# Altium PCB sitiboard.PcbDoc (part 1 of 2)
Units mm, origin at the board's own origin, x right, y up, seen from the top; angles counter-clockwise.
Board outline 72 x 45 mm, 2 copper layers (Top Layer, Bottom Layer), stack 1.57 mm thick; 60 components, 63 nets, 238 pads, 62 vias.
Unrouted connection lines stored in the file: 20.
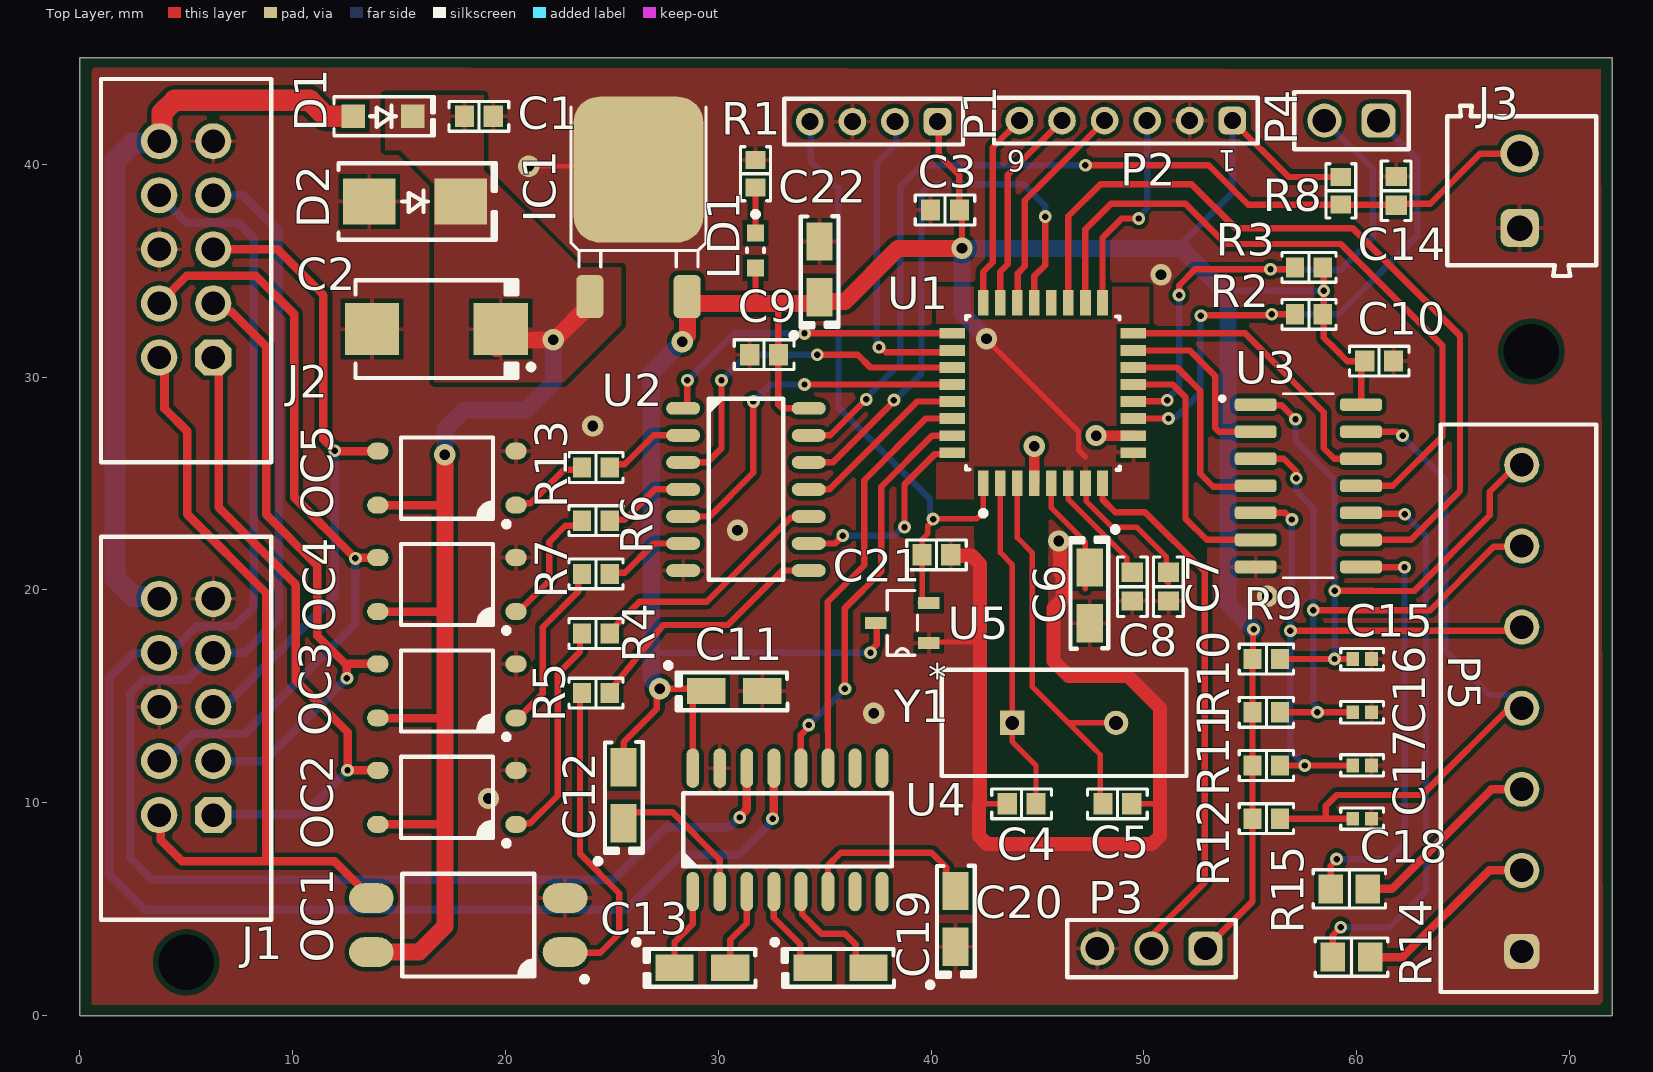
[diagram p0: Top Layer view]
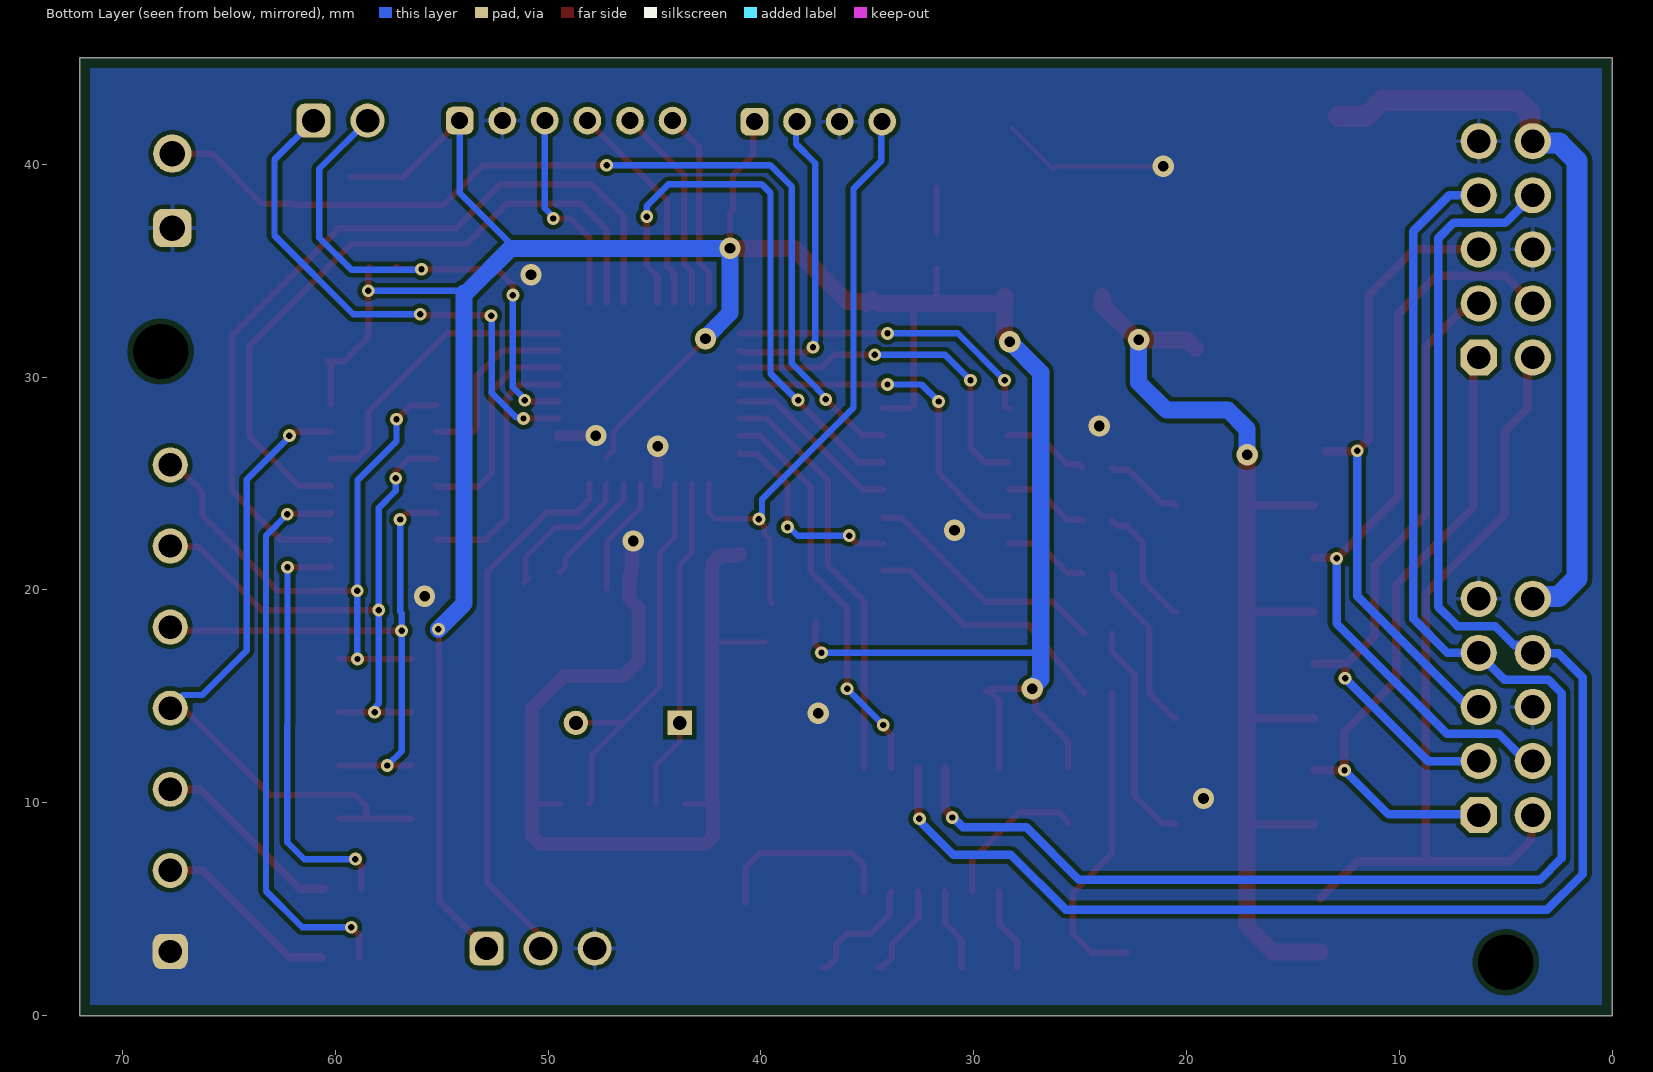
[diagram p1: Bottom Layer view, seen from below]
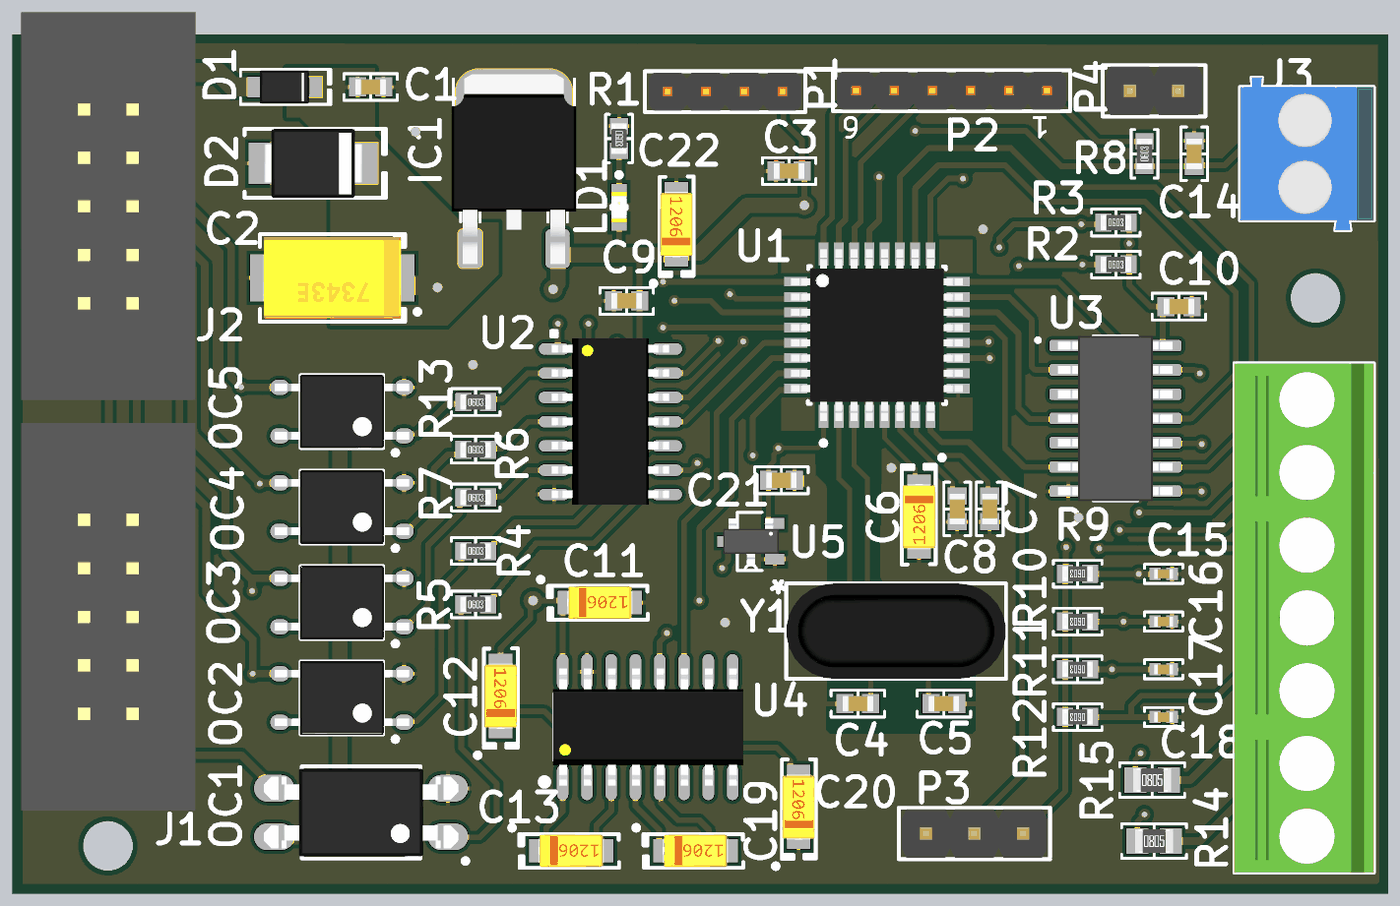
[diagram p2: 3D render of the assembled board from above, using the file's embedded part models]

## Layer stack, top to bottom
Top Solder: solder mask 0.0254, SM-001, Dk 4
Top Layer: signal copper 0.035
Dielectric 1: core 1.5, FR4, Dk 4.6
Bottom Layer: signal copper 0.035
Bottom Solder: solder mask 0.0254, SM-001, Dk 4

## Board outline
0,0 0,45 72,45 72,0

## Design rules (kind name [scope] priority, off if disabled: settings)
AcuteAngle [All] p1: minimum=3.50000000000000E+0001 checktracksonly=FALSE
BoardOutlineClearance "BoardOutlineClearance 1" [All] p1: gap=0.25 ignorepadtopadclearanceinfootprint=FALSE except(0: Arc-SplitContinuation Track-SplitContinuation SMDPad-SplitContinuation THPad-SplitContinuation Via-SplitContinuation Fill-SplitContinuation Poly-SplitContinuation Region-SplitContinuation Text-SplitContinuation) // Milling
BoardOutlineClearance "BoardOutlineClearance 2" [All] p2 off: gap=0.4 ignorepadtopadclearanceinfootprint=FALSE except(0: Arc-SplitContinuation Track-SplitContinuation SMDPad-SplitContinuation THPad-SplitContinuation Via-SplitContinuation Fill-SplitContinuation Poly-SplitContinuation Region-SplitContinuation Text-SplitContinuation) // V-Cut
Clearance "Clearance 3 Oz" [All] p1 off: gap=0.35 ignorepadtopadclearanceinfootprint=FALSE except(0.25: Arc-Hole Track-Hole SMDPad-Hole THPad-Hole Via-Hole Fill-Hole Poly-Hole Region-Hole Text-Hole)
Clearance "Clearance 2 Oz" [All] p2 off: gap=0.3 ignorepadtopadclearanceinfootprint=FALSE except(0.25: Arc-Hole Track-Hole SMDPad-Hole THPad-Hole Via-Hole Fill-Hole Poly-Hole Region-Hole Text-Hole)
Clearance "Clearance-1 1 Oz" [All] p3: gap=0.2 ignorepadtopadclearanceinfootprint=FALSE except(0.25: Arc-Hole Track-Hole SMDPad-Hole THPad-Hole Via-Hole Fill-Hole Poly-Hole Region-Hole Text-Hole) // Standart
Clearance "Clearance-2 1 Oz" [All] p4 off: gap=0.15 ignorepadtopadclearanceinfootprint=FALSE except(0.2: Arc-Fill Arc-Poly Track-Fill Track-Poly SMDPad-Fill SMDPad-Poly THPad-Fill THPad-Poly Via-Fill Via-Poly Fill-Fill Fill-Poly Poly-Poly; 0.25: Arc-Hole Track-Hole SMDPad-Hole THPad-Hole Via-Hole Fill-Hole Poly-Hole Region-Hole Text-Hole) // Advance
Clearance "Clearance-1 1/2 Oz" [All] p5 off: gap=0.125 ignorepadtopadclearanceinfootprint=FALSE except(0.2: Arc-Fill Arc-Poly Track-Fill Track-Poly SMDPad-SMDPad SMDPad-Fill SMDPad-Poly THPad-Fill THPad-Poly Via-Fill Via-Poly Fill-Fill Fill-Poly Poly-Poly Poly-Region Poly-Text; 0.25: Arc-Hole Track-Hole SMDPad-Hole THPad-Hole Via-Hole Fill-Hole Poly-Hole Region-Hole Text-Hole) // Standart
Clearance "Clearance-2 1/2 Oz" [All] p6 off: gap=0.1 ignorepadtopadclearanceinfootprint=FALSE except(0.15: Arc-Fill Arc-Poly Track-Fill Track-Poly SMDPad-SMDPad SMDPad-Fill SMDPad-Poly THPad-Fill THPad-Poly Via-Fill Via-Poly Fill-Fill Fill-Poly Poly-Poly Poly-Region Poly-Text; 0.25: Arc-Hole Track-Hole SMDPad-Hole THPad-Hole Via-Hole Fill-Hole Poly-Hole Region-Hole Text-Hole) // Advance
DiffPairsRouting "DiffPairsRouting 1 Oz" [All] p1: maxlimit=0.254 minlimit=0.2 mostfreqgap=0.254 toplayer_minwidth=0.2 toplayer_maxwidth=0.381 toplayer_prefwidth=0.381 bottomlayer_minwidth=0.2 bottomlayer_maxwidth=0.381 bottomlayer_prefwidth=0.381 maxuncoupledlength=12.7
DiffPairsRouting "DiffPairsRouting 1/2 Oz" [All] p2: maxlimit=0.254 minlimit=0.1 mostfreqgap=0.254 toplayer_minwidth=0.1 toplayer_maxwidth=0.381 toplayer_prefwidth=0.381 bottomlayer_minwidth=0.1 bottomlayer_maxwidth=0.381 bottomlayer_prefwidth=0.381 maxuncoupledlength=12.7
HoleSize "Minimum HoleSize" [IsPad] p1: absolutevalues=TRUE maxlimit=5.9 minlimit=0.6 maxpercent=80.000 minpercent=20.000
HoleSize "Minimum HoleSize VIA 1" [IsVia] p2: absolutevalues=TRUE maxlimit=5.9 minlimit=0.3 maxpercent=80.000 minpercent=20.000 // Standart
HoleSize "Minimum HoleSize VIA 2" [IsVia] p3: absolutevalues=TRUE maxlimit=5.9 minlimit=0.2 maxpercent=80.000 minpercent=20.000 // Advance
HoleToHoleClearance Hole2HoleClearance [All] p1: gap=0.25 allowstackedmicrovias=FALSE
MinimumAnnularRing "Minimum AR VIA Standart" [IsVia] p1: minimumring=0.15
MinimumAnnularRing "Minimum AR PAD Standart" [IsPAD] p2: minimumring=0.2
MinimumAnnularRing "Minimum AR VIA Advance" [IsVia] p3: minimumring=0.1
MinimumAnnularRing "Minimum AR PAD Advance" [IsPAD] p4: minimumring=0.15
MinimumSolderMaskSliver "SolderMask Bridge Standart" [All] p1: minsoldermaskwidth=0.15 // All Masks
MinimumSolderMaskSliver "SolderMask Bridge Advance" [All] p2: minsoldermaskwidth=0.1 // Mask LDI
PlaneClearance "PlaneClearance 3 Oz" [All] p1: clearance=0.35
PlaneClearance "PlaneClearance 2 Oz" [All] p2: clearance=0.3
PlaneClearance "PlaneClearance 1 Oz" [All] p3: clearance=0.2
PlaneClearance "PlaneClearance-1 1/2 Oz" [All] p4: clearance=0.2 // Standart
PlaneClearance "PlaneClearance-2 1/2 Oz" [All] p5: clearance=0.15 // Advance
PlaneConnect "TermalConnect 3 Oz" [All] p1: planeconnectstyle=Relief reliefexpansion=0.2 reliefentries=4 reliefconductorwidth=0.35 reliefairgap=0.35 // Standart
PlaneConnect "TermalConnect 2 Oz" [All] p2: planeconnectstyle=Relief reliefexpansion=0.2 reliefentries=4 reliefconductorwidth=0.3 reliefairgap=0.3 // Standart
PlaneConnect "TermalConnect-1 1 Oz" [All] p3: planeconnectstyle=Relief reliefexpansion=0.2 reliefentries=4 reliefconductorwidth=0.2 reliefairgap=0.2 // Standart
PlaneConnect "TermalConnect-2 1 Oz" [All] p4: pad.planeconnectstyle=Relief pad.reliefexpansion=0.15 pad.reliefentries=4 pad.reliefconductorwidth=0.2 pad.reliefairgap=0.2 via.planeconnectstyle=Direct via.reliefexpansion=0.15 via.reliefentries=4 via.reliefconductorwidth=0.15 via.reliefairgap=0.15 // Advance
PlaneConnect "TermalConnect-1 1/2 Oz" [All] p5: planeconnectstyle=Relief reliefexpansion=0.2 reliefentries=4 reliefconductorwidth=0.2 reliefairgap=0.2 // Standart
PlaneConnect "TermalConnect-2 1/2 Oz" [All] p6: pad.planeconnectstyle=Relief pad.reliefexpansion=0.15 pad.reliefentries=4 pad.reliefconductorwidth=0.15 pad.reliefairgap=0.15 via.planeconnectstyle=Direct via.reliefexpansion=0.15 via.reliefentries=4 via.reliefconductorwidth=0.15 via.reliefairgap=0.15 // Advance
PolygonConnect "PolygonConnect 3 Oz" [All] p1 off: thpad.connectstyle=Relief thpad.reliefconductorwidth=0.35 thpad.reliefentries=4 thpad.polygonreliefangle="90 Angle" thpad.airgapwidth=0.35 smdpad.connectstyle=Relief smdpad.reliefconductorwidth=0.35 smdpad.reliefentries=4 smdpad.polygonreliefangle="90 Angle" smdpad.airgapwidth=0.35 via.connectstyle=Direct via.reliefconductorwidth=0.254 via.reliefentries=4 via.polygonreliefangle="90 Angle" via.airgapwidth=0.254
PolygonConnect "PolygonConnect 2 Oz" [All] p2 off: thpad.connectstyle=Relief thpad.reliefconductorwidth=0.3 thpad.reliefentries=4 thpad.polygonreliefangle="90 Angle" thpad.airgapwidth=0.3 smdpad.connectstyle=Relief smdpad.reliefconductorwidth=0.3 smdpad.reliefentries=4 smdpad.polygonreliefangle="90 Angle" smdpad.airgapwidth=0.3 via.connectstyle=Direct via.reliefconductorwidth=0.254 via.reliefentries=4 via.polygonreliefangle="90 Angle" via.airgapwidth=0.254
PolygonConnect "PolygonConnect-1 1 Oz" [All] p3: thpad.connectstyle=Relief thpad.reliefconductorwidth=0.2 thpad.reliefentries=4 thpad.polygonreliefangle="90 Angle" thpad.airgapwidth=0.2 smdpad.connectstyle=Relief smdpad.reliefconductorwidth=0.2 smdpad.reliefentries=4 smdpad.polygonreliefangle="90 Angle" smdpad.airgapwidth=0.2 via.connectstyle=Direct via.reliefconductorwidth=0.254 via.reliefentries=4 via.polygonreliefangle="90 Angle" via.airgapwidth=0.254 // Standart
PolygonConnect "PolygonConnect-2 1 Oz" [All] p4 off: thpad.connectstyle=Relief thpad.reliefconductorwidth=0.15 thpad.reliefentries=4 thpad.polygonreliefangle="90 Angle" thpad.airgapwidth=0.15 smdpad.connectstyle=Relief smdpad.reliefconductorwidth=0.15 smdpad.reliefentries=4 smdpad.polygonreliefangle="90 Angle" smdpad.airgapwidth=0.15 via.connectstyle=Direct via.reliefconductorwidth=0.254 via.reliefentries=4 via.polygonreliefangle="90 Angle" via.airgapwidth=0.254 // Advance
PolygonConnect "PolygonConnect-1 1/2 Oz" [All] p5 off: thpad.connectstyle=Relief thpad.reliefconductorwidth=0.15 thpad.reliefentries=4 thpad.polygonreliefangle="90 Angle" thpad.airgapwidth=0.2 smdpad.connectstyle=Relief smdpad.reliefconductorwidth=0.2 smdpad.reliefentries=4 smdpad.polygonreliefangle="90 Angle" smdpad.airgapwidth=0.2 via.connectstyle=Direct via.reliefconductorwidth=0.254 via.reliefentries=4 via.polygonreliefangle="90 Angle" via.airgapwidth=0.254 // Standart
PolygonConnect "PolygonConnect-2 1/2 Oz" [All] p6 off: thpad.connectstyle=Relief thpad.reliefconductorwidth=0.125 thpad.reliefentries=4 thpad.polygonreliefangle="90 Angle" thpad.airgapwidth=0.15 smdpad.connectstyle=Relief smdpad.reliefconductorwidth=0.125 smdpad.reliefentries=4 smdpad.polygonreliefangle="90 Angle" smdpad.airgapwidth=0.15 via.connectstyle=Direct via.reliefconductorwidth=0.254 via.reliefentries=4 via.polygonreliefangle="90 Angle" via.airgapwidth=0.254 // Advance
RoutingCorners [All] p1 off: cornerstyle=45-Degree minsetback=2.54 maxsetback=2.54
RoutingVias [All] p1: holewidth=0.3 width=0.6 viastyle="Through Hole" minholewidth=0.2 minwidth=0.4 maxholewidth=5.9 maxwidth=6.4
SilkToSilkClearance Silk2SilkClearance [All] p1 off: silktosilkclearance=0.15
SilkToSolderMaskClearance Silk2SolderMaskClearance [IsPad] p1 off: minsilkscreentomaskgap=0.15 clearancetoexposedcopper=TRUE
SolderMaskExpansion SolderMaskExpansion-1 [All] p1: expansion=0.05 istentingtop=FALSE // Standart
SolderMaskExpansion "SolderMaskExpansion LDI" [All] p2: expansion=0.025 istentingtop=FALSE // Advance
UnRoutedNet [All] p1: checkbadconnections=TRUE
Width "Width 3 Oz" [All] p1 off: maxlimit=10 minlimit=0.35 preferedwidth=0.4 checkconnectedcopper=TRUE
Width "Width 2 Oz" [All] p2 off: maxlimit=10 minlimit=0.3 preferedwidth=0.35 minimp=50.000000 maximp=50.000000 favimp=50.000000 checkconnectedcopper=TRUE
Width "Width 1 Oz" [All] p3: maxlimit=10 minlimit=0.15 preferedwidth=0.2 checkconnectedcopper=TRUE
Width "Width 1/2 Oz" [All] p4 off: maxlimit=10 minlimit=0.1 preferedwidth=0.125 checkconnectedcopper=TRUE
20 further rules are at their usual default settings.

## Components (designator, comment, footprint, x,y, rotation, side; value= is the part's Value field where it differs from the comment)
C1 "0.1µF" "CAP 0603_1608" 18.75,42.25 r180 top
C2 "15µF" "CAP POL 2917_7343" 16.75,32.25 r180 top
C3 "0.1µF" "CAP 0603_1608" 40.65,37.85 r0 top
C4 "20pF" "CAP 0603_1608" 44.25,9.95 r0 top
C5 "20pF" "CAP 0603_1608" 48.75,9.95 r180 top
C6 "1µF" "CAP POL 1206_3216" 47.45,19.74 r270 top
C7 "0.1µF" "CAP 0603_1608" 51.15,20.15 r90 top
C8 "0.1µF" "CAP 0603_1608" 49.45,20.15 r270 top
C9 "0.1µF" "CAP 0603_1608" 32.15,31.05 r180 top
C10 "0.1µF" "CAP 0603_1608" 61.05,30.75 r0 top
C11 "0.47µF" "CAP POL 1206_3216" 30.75,15.25 r0 top
C12 "0.47µF" "CAP POL 1206_3216" 25.55,10.35 r90 top
C13 "0.47µF" "CAP POL 1206_3216" 29.25,2.25 r0 top
C14 "0.1µF" "CAP 0603_1608" 61.85,38.75 r270 top
C15 "0.1µF" "CAP 0402_1005" 60.25,16.75 r180 top
C16 "0.1µF" "CAP 0402_1005" 60.25,14.25 r180 top
C17 "0.1µF" "CAP 0402_1005" 60.25,11.75 r180 top
C18 "0.1µF" "CAP 0402_1005" 60.25,9.25 r180 top
C19 "0.47µF" "CAP POL 1206_3216" 35.75,2.25 r0 top
C20 "0.47µF" "CAP POL 1206_3216" 41.15,4.54 r90 top
C21 "0.1µF" "CAP 0603_1608" 40.25,21.65 r180 top
C22 "1µF" "CAP POL 1206_3216" 34.75,35.06 r90 top
D1 "SS24FL" SOD-123W 14.25,42.25 r0 top
D2 "SMBJ15CA-E3/52" "DO214AA SMB" 15.75,38.25 r0 top
IC1 "MC7805BDTG" TO-252AA 23.964,33.781 r0 top
J1 "10 Pin" "CON: IDC-10MS - 1_7mm" 5,14.5 r90 top locked
J2 "10 Pin" "CON: IDC-10MS - 1_7mm" 5,36 r90 top locked
J3 "691103110002" 691103110002 67.75,38.75 r90 top
LD1 "Yellow" LED_KINGBRIGHT_KPH-1608YC 31.75,35.95 r270 top
OC1 "LTV-817S-C" "LITEON LTV-817" 18.25,4.25 r180 top locked
OC2 "LTV-357T-C" "LITEON LTV-357T" 17.25,10.25 r180 top
OC3 "LTV-357T-C" "LITEON LTV-357T" 17.25,15.25 r180 top
OC4 "LTV-357T-C" "LITEON LTV-357T" 17.25,20.25 r180 top
OC5 "LTV-357T-C" "LITEON LTV-357T" 17.25,25.25 r180 top
P1 "62000411121" 62000411121 37.3,42 r180 top locked
P2 "62000611121" 62000611121 49.15,42.05 r180 top
P3 "61300311121" 61300311121 50.35,3.15 r180 top
P4 "61300211121" 61300211121 59.75,42.05 r180 top
P5 "691243310007" 691243310007 67.6,14.44 r90 top
R1 "2.2 kOhms" "RES 0603_1608" 31.75,39.55 r270 top
R2 "2.2 kOhms" "RES 0603_1608" 57.75,32.95 r0 top
R3 "2.2 kOhms" "RES 0603_1608" 57.75,35.15 r0 top
R4 "220 Ohms" "RES 0603_1608" 24.25,17.95 r0 top
R5 "220 Ohms" "RES 0603_1608" 24.25,15.15 r0 top
R6 "220 Ohms" "RES 0603_1608" 24.25,23.25 r0 top
R7 "220 Ohms" "RES 0603_1608" 24.25,20.75 r0 top
R8 "2.2 kOhms" "RES 0603_1608" 59.25,38.75 r90 top
R9 "2.2 kOhms" "RES 0603_1608" 55.75,16.75 r180 top
R10 "2.2 kOhms" "RES 0603_1608" 55.75,14.25 r180 top
R11 "2.2 kOhms" "RES 0603_1608" 55.75,11.75 r180 top
R12 "2.2 kOhms" "RES 0603_1608" 55.75,9.25 r180 top
R13 "220 Ohms" "RES 0603_1608" 24.25,25.75 r0 top
R14 "270 Ohms" "RES 0805_2012" 59.75,2.75 r0 top
R15 "270 Ohms" "RES 0805_2012" 59.65,5.95 r0 top
U1 "STM8S005K6T6C" STMicroelectronics_LQFP32-5V_0 45.25,29.25 r0 top locked
U2 "SN74ACT14DR" 14-SOIC 28.35,28.53 r0 top locked
U3 "CD74AC14M96" SOIC127P600X175-14N 57.725,24.89 r0 top locked
U4 "ST232BDR" 16-SO 33.25,8.75 r90 top locked
U5 "MAX809MTRG" SOT95P240X111-3N 38.65,18.45 r180 top
Y1 "Crys_Abracon_ABL-16.000MHZ-B2_eec" Abracon_ABL-16.000MHZ-B2_0 46.25,13.75 r0 top

## Footprints (in the part's own frame and the unit in brackets; to place one, negate y for a bottom-side part, rotate by r counter-clockwise, add the part's x,y. Pads: shape width x height; smd on the part's side, far side on the other; paste and mask are expansions set on the pad)
14-SOIC [mm]
  rrect100% 1.6x0.6 smd: 1(0,0) 2(0,-1.27) 3(0,-2.54) 4(0,-3.81) 5(0,-5.08) 6(0,-6.35) 7(0,-7.62) 8(5.9,-7.62) 9(5.9,-6.35) 10(5.9,-5.08) 11(5.9,-3.81) 12(5.9,-2.54) 13(5.9,-1.27) 14(5.9,0)
  rrect50% 0.5x0.5 on Top Overlay: ""(0,0.8)
  round 0.5 on Mech1: ""(0.5,0)
  silkscreen extent 1.2,-8.05 4.7,0.45, body extent -0.12,-8.15 6.02,0.55, height 1.78
16-SO [mm]
  oval 1.85x0.6 smd: 1(-2.925,4.448) 2(-2.925,3.178) 3(-2.925,1.908) 4(-2.925,0.638) 5(-2.925,-0.632) 6(-2.925,-1.902) 7(-2.925,-3.172) 8(-2.925,-4.442) 9(2.875,-4.442) 10(2.875,-3.172) 11(2.875,-1.902) 12(2.875,-0.632) 13(2.875,0.638) 14(2.875,1.908) 15(2.875,3.178) 16(2.875,4.448)
  round 0.7 on Mech1: 25(-2.5,4.3)
  round 0.7 on Top Overlay: ""(-2.9,5.4)
  silkscreen extent -1.75,-4.9 1.7,4.9, body extent -3.09,-5.01 3.04,4.96, height 1.73
61300211121 [mm] "Pin Header, pitch 2.54 mm, THT, Vertical, single row, 2p"
  rrect50% 1.6x1.6 hole 1.1: 1(-1.27,0)
  round 1.6 hole 1.1: 2(1.27,0)
  silkscreen extent -2.69,-1.35 2.69,1.35, body extent -2.54,-1.27 2.54,1.27, height 8.57
61300311121 [mm] "Pin Header, pitch 2.54 mm, THT, Vertical, single row, 3p"
  rrect50% 1.6x1.6 hole 1.1: 1(-2.54,0)
  round 1.6 hole 1.1: 2(0,0) 3(2.54,0)
  silkscreen extent -3.96,-1.35 3.96,1.35, body extent -3.81,-1.27 3.81,1.27, height 8.57
62000411121 [mm] "Pin Header, pitch 2.00 mm, THT, Vertical, single row, 4p"
  rrect50% 1.3x1.3 hole 0.8: 1(-3,0)
  round 1.3 hole 0.8: 2(-1,0) 3(1,0) 4(3,0)
  silkscreen extent -4.2,-1.07 4.2,1.07, body extent -4,-1 4,1, height 6.05
62000611121 [mm] "Pin Header, pitch 2.00 mm, THT, Vertical, single row, 6p"
  rrect50% 1.3x1.3 hole 0.8: 1(-5,0)
  round 1.3 hole 0.8: 2(-3,0) 3(-1,0) 4(1,0) 5(3,0) 6(5,0)
  silkscreen extent -6.2,-1.07 6.2,1.07, body extent -6,-1 6,1, height 6.05
691103110002 [mm]
  rrect50% 1.8x1.8 hole 1.2: 1(-1.75,0.1)
  round 1.8 hole 1.2: 2(1.75,0.1)
  silkscreen extent -4,-3.5 4,3.5, body extent -4,-3.5 4,3.5, height 8.45
691243310007 [mm] "Serie 2433 - 3.81 mm _ 7 pins"
  rrect50% 1.65x1.65 hole 1.1: 1(-11.43,-0.15)
  round 1.65 hole 1.1: 2(-7.62,-0.15) 3(-3.81,-0.15) 4(0,-0.15) 5(3.81,-0.15) 6(7.62,-0.15) 7(11.43,-0.15)
  silkscreen extent -13.33,-3.65 13.33,3.65, body extent -13.33,-3.65 13.33,3.65, height 9.15
Abracon_ABL-16.000MHZ-B2_0 [mm]
  rect 1.15x1.15 hole 0.65 paste-1000 mask+0: 1(-2.44,0)
  round 1.15 hole 0.65 paste-1000 mask+0: 2(2.44,0)
  silkscreen extent -5.75,-2.5 5.75,2.5, body extent -5.85,-2.6 5.85,2.6, height 0.25
"CAP 0402_1005" [mm]
  rect 0.6x0.64 smd: 1(-0.44,0) 2(0.44,0)
  silkscreen extent -1,-0.5 1,0.5, body extent -0.5,-0.26 0.5,0.26, height 0.52
"CAP 0603_1608" [mm] "Chip Capacitor, 2-Leads, Body 1.60x0.80mm, IPC Medium Density"
  rect 0.9x1 smd: 1(-0.675,0) 2(0.675,0)
  silkscreen extent -1.4,-0.7 1.4,0.7, body extent -0.8,-0.41 0.8,0.41, height 0.82
"CAP POL 1206_3216" [mm] "Molded Capacitor, 2-Leads, Body 3.20x1.6mm, IPC Medium Density"
  rect 1.8x1.23 smd: 1(-1.31,0) 2(1.31,0)
  silkscreen extent -3.22,-0.9 2.5,1.33, body extent -1.72,-0.85 1.71,0.85, height 1.7
"CAP POL 2917_7343" [mm] "Molded Capacitor, 2-Leads, Body 7.30x4.30mm, IPC Medium Density"
  rect 2.55x2.45 smd: 1(-3.025,0) 2(3.025,0)
  silkscreen extent -4.58,-2.3 3.8,2.3, body extent -3.65,-2.15 3.65,2.15, height 4.1
"CON: IDC-10MS - 1_7mm" [mm]
  oct 1.7x1.7 hole 1.1: 1(-5.08,-1.27)
  round 1.7 hole 1.1: 2(-5.08,1.27) 3(-2.54,-1.27) 4(-2.54,1.27) 5(0,-1.27) 6(0,1.27) 7(2.54,-1.27) 8(2.54,1.27) 9(5.08,-1.27) 10(5.08,1.27)
  round 0.5 on Mech1: ""(-9.6,-4)
  round 0.5 on Top Overlay: ""(-9,-3.5)
  silkscreen extent -10,-4 8,4, body extent -10.14,-4.57 10.16,4.53, height 9
"DO214AA SMB" [mm]
  rect 2.45x2.15 smd: 1(-2.15,0) 2(2.15,0)
  silkscreen extent -3.6,-1.8 3.8,1.8, body extent -2.6,-1.8 2.6,1.8, height 2.4
LED_KINGBRIGHT_KPH-1608YC [mm]
  rect 0.8x0.8 smd: 1(-0.825,0) 2(0.825,0)
  silkscreen extent -1.82,-0.4 0.08,0.4, body extent -0.8,-0.4 0.8,0.4, height 0.65
"LITEON LTV-357T" [mm]
  oval 1x0.8 smd: 1(-3.25,1.27) 2(-3.25,-1.27) 3(3.25,-1.27) 4(3.25,1.27)
  silkscreen extent -2.92,-1.91 2.16,2.28, body extent -3.51,-1.93 3.51,1.92, height 2.1
"LITEON LTV-817" [mm]
  oval 2.1x1.4 smd: 1(-4.55,1.27) 2(-4.55,-1.27) 3(4.55,-1.27) 4(4.55,1.27)
  silkscreen extent -5.59,-2.41 3.1,2.66, body extent -5.1,-2.3 5.1,2.3, height 3.85
"RES 0603_1608" [mm]
  rect 0.85x0.95 smd: 1(-0.65,0) 2(0.65,0)
  silkscreen extent -1.27,-0.7 1.27,0.7, body extent -0.8,-0.4 0.8,0.4, height 0.45
"RES 0805_2012" [mm]
  rect 1.15x1.35 smd: 1(-0.875,0) 2(0.875,0)
  silkscreen extent -1.7,-0.9 1.7,0.9, body extent -1,-0.62 1,0.63, height 0.6
SOD-123W [mm]
  rect 1.1x1.1 smd: 1(-1.4,0) 2(1.4,0)
  silkscreen extent -2.31,-0.92 2.41,0.92, body extent -1.75,-0.87 1.75,0.87, height 0.95
SOIC127P600X175-14N [mm]
  rrect50% 1.97x0.6 smd: 1(-2.475,3.81) 2(-2.475,2.54) 3(-2.475,1.27) 4(-2.475,0) 5(-2.475,-1.27) 6(-2.475,-2.54) 7(-2.475,-3.81) 8(2.475,-3.81) 9(2.475,-2.54) 10(2.475,-1.27) 11(2.475,0) 12(2.475,1.27) 13(2.475,2.54) 14(2.475,3.81)
  silkscreen extent -4.15,-4.33 1.17,4.33, body extent -3,-4.33 3,4.33, height 1.75
SOT95P240X111-3N [mil]
  rect 40x22 smd: 1(-49,37) 2(-49,-37) 3(49,0)
  silkscreen extent -28,-60 28,60, body extent -57,-47 57,47, height 44
STMicroelectronics_LQFP32-5V_0 [mm]
  rect 0.5x1.2 smd paste+0 mask+0: 1(-2.8,-4.25) 2(-2,-4.25) 3(-1.2,-4.25) 4(-0.4,-4.25) 5(0.4,-4.25) 6(1.2,-4.25) 7(2,-4.25) 8(2.8,-4.25) 17(2.8,4.25) 18(2,4.25) 19(1.2,4.25) 20(0.4,4.25) 21(-0.4,4.25) 22(-1.2,4.25) 23(-2,4.25) 24(-2.8,4.25)
  rect 1.2x0.5 smd paste+0 mask+0: 9(4.25,-2.8) 10(4.25,-2) 11(4.25,-1.2) 12(4.25,-0.4) 13(4.25,0.4) 14(4.25,1.2) 15(4.25,2) 16(4.25,2.8) 25(-4.25,2.8) 26(-4.25,2) 27(-4.25,1.2) 28(-4.25,0.4) 29(-4.25,-0.4) 30(-4.25,-1.2) 31(-4.25,-2) 32(-4.25,-2.8)
  silkscreen extent -3.61,-5.77 3.61,3.61, body extent -4.95,-4.95 4.95,4.95, height 0.25
TO-252AA [mil]
  rrect40% 50x80 smd: 1(0,0) 3(180,0)
  rrect40% 240x270 smd: 4(90,235)
  silkscreen extent -35,55 215,350, body extent -39,-32 219,359, height 91

## Part data
C1 C3 C7 C8 C9 C10 C14 C21: library part CC0603KRX5R9BB104, "CAP CER 0.1UF 50V X5R 0603", Device Package="0603 (1608 Metric)", Manufacturer=Yageo, Operating Temperature="-55°C ~ 85°C", Supplier Part Number 1=311-4046-1-ND, Temperature Coefficient=X5R, Tolerance=±10%, Voltage - Rated=50V, Applications="General Purpose", Capacitance=0.1µF, ComponentLink1Description=Datasheet, ComponentLink1URL=https://www.yageo.com/upload/media/product/productsearch/datasheet/mlcc/UPY-GPHC_X5R_4V-to-50V_25.pdf, ComponentLink2Description="DigiKey Link", ComponentLink2URL=http://digikey.com/product-detail/en/yageo/CC0603KRX5R9BB104/311-4046-1-ND/8025135, LastUpdated="02.09.2020 1:03:08", Lifecycle Status=Active, Minimum Order=1, Mounting Type="Surface Mount, MLCC", Package / Case="0603 (1608 Metric)", Packaging=TapeAndReel, Part Number=CC0603KRX5R9BB104, Part Status=Active, PartId=15794, Price=0.01, Series=CC, Size / Dimension="0.063\" L x 0.031\" W (1.60mm x 0.80mm)", Supplier 1=DigiKey, Thickness (Max)="0.035\" (0.90mm)"
C2: library part 593D156X9035D2TE3, "CAP TANT 15UF 10% 35V 2917", Device Package="2917 (7343 Metric)", ESR (Equivalent Series Resistance)=300mOhm, Manufacturer="Vishay Sprague", Manufacturer Size Code=D, Operating Temperature="-55°C ~ 125°C", Supplier Part Number 1=718-1103-1-ND, Tolerance=±10%, Voltage - Rated=35V, Capacitance=15µF, ComponentLink1Description=Datasheet, ComponentLink1URL=http://www.vishay.com/docs/40005/593d.pdf, ComponentLink2Description="DigiKey Link", ComponentLink2URL=http://digikey.com/product-detail/en/vishay-sprague/593D156X9035D2TE3/718-1103-1-ND/1559597, Features="General Purpose", Height - Seated (Max)="0.122\" (3.10mm)", LastUpdated="02.09.2020 1:16:12", Lifecycle Status=Active, Minimum Order=1, Mounting Type="Surface Mount", Package / Case="2917 (7343 Metric)", Packaging=TapeAndReel, Part Number=593D156X9035D2TE3, Part Status=Active, PartId=3227, Price=0.38, Series="TANTAMOUNT®, 593D", Size / Dimension="0.287\" L x 0.169\" W (7.30mm x 4.30mm)", Supplier 1=DigiKey, Type=Molded
C4 C5: library part CC0603JRNPO9BN200, "CAP CER 20PF 50V C0G/NPO 0603", Device Package="0603 (1608 Metric)", Manufacturer=Yageo, Operating Temperature="-55°C ~ 125°C", Supplier Part Number 1=311-1424-1-ND, Temperature Coefficient="C0G, NP0", Tolerance=±5%, Voltage - Rated=50V, Applications="General Purpose", Capacitance=20pF, ComponentLink1Description=Datasheet, ComponentLink1URL=https://www.yageo.com/upload/media/product/productsearch/datasheet/mlcc/UPY-GP_NP0_16V-to-50V_17.pdf, ComponentLink2Description="DigiKey Link", ComponentLink2URL=http://digikey.com/product-detail/en/yageo/CC0603JRNPO9BN200/311-1424-1-ND/2833730, LastUpdated="02.09.2020 1:03:05", Lifecycle Status=Active, Minimum Order=1, Mounting Type="Surface Mount, MLCC", Package / Case="0603 (1608 Metric)", Packaging=TapeAndReel, Part Number=CC0603JRNPO9BN200, Part Status=Active, PartId=16728, Price=0.01, Series=CC, Size / Dimension="0.063\" L x 0.031\" W (1.60mm x 0.80mm)", Supplier 1=DigiKey, Thickness (Max)="0.035\" (0.90mm)"
C6 C22: library part 293D105X9020A2TE3, "CAP TANT 1UF 10% 20V 1206", Device Package="1206 (3216 Metric)", ESR (Equivalent Series Resistance)=8.4Ohm, Manufacturer="Vishay Sprague", Manufacturer Size Code=A, Operating Temperature="-55°C ~ 125°C", Supplier Part Number 1=718-1114-1-ND, Tolerance=±10%, Voltage - Rated=20V, Capacitance=1µF, ComponentLink1Description=Datasheet, ComponentLink1URL=http://www.vishay.com/docs/40002/293d.pdf, ComponentLink2Description="DigiKey Link", ComponentLink2URL=http://digikey.com/product-detail/en/vishay-sprague/293D105X9020A2TE3/718-1114-1-ND/1559608, Features="General Purpose", Height - Seated (Max)="0.071\" (1.80mm)", LastUpdated="02.09.2020 1:15:57", Lifecycle Status=Active, Minimum Order=1, Mounting Type="Surface Mount", Package / Case="1206 (3216 Metric)", Packaging=TapeAndReel, Part Number=293D105X9020A2TE3, Part Status=Active, PartId=822, Price=0.11, Series="TANTAMOUNT®, 293D", Size / Dimension="0.126\" L x 0.063\" W (3.20mm x 1.60mm)", Supplier 1=DigiKey, Type=Molded
C11 C12 C13 C19 C20: library part 293D474X9035A2TE3, "CAP TANT 0.47UF 10% 35V 1206", Device Package="1206 (3216 Metric)", ESR (Equivalent Series Resistance)=10Ohm, Manufacturer="Vishay Sprague", Manufacturer Size Code=A, Operating Temperature="-55°C ~ 125°C", Supplier Part Number 1=718-1808-1-ND, Tolerance=±10%, Voltage - Rated=35V, Capacitance=0.47µF, ComponentLink1Description=Datasheet, ComponentLink1URL=http://www.vishay.com/docs/40002/293d.pdf, ComponentLink2Description="DigiKey Link", ComponentLink2URL=http://digikey.com/product-detail/en/vishay-sprague/293D474X9035A2TE3/718-1808-1-ND/2259950, Features="General Purpose", Height - Seated (Max)="0.071\" (1.80mm)", LastUpdated="02.09.2020 1:15:57", Lifecycle Status=Active, Minimum Order=1, Mounting Type="Surface Mount", Package / Case="1206 (3216 Metric)", Packaging=TapeAndReel, Part Number=293D474X9035A2TE3, Part Status=Active, PartId=592, Price=0.12, Series="TANTAMOUNT®, 293D", Size / Dimension="0.126\" L x 0.063\" W (3.20mm x 1.60mm)", Supplier 1=DigiKey, Type=Molded
C15 C16 C17 C18: library part CGA2B2X5R1A104K050BA, "CAP CER 0.1UF 10V X5R 0402", Device Package="0402 (1005 Metric)", Manufacturer="TDK Corporation", Operating Temperature="-55°C ~ 85°C", Ratings=AEC-Q200, Supplier Part Number 1=445-12156-1-ND, Temperature Coefficient=X5R, Tolerance=±10%, Voltage - Rated=10V, Applications=Automotive, Capacitance=0.1µF, ComponentLink1Description=Datasheet, ComponentLink1URL=https://product.tdk.com/info/en/catalog/datasheets/mlcc_automotive_general_en.pdf?ref_disty=digikey, ComponentLink2Description="DigiKey Link", ComponentLink2URL=http://digikey.com/product-detail/en/tdk-corporation/CGA2B2X5R1A104K050BA/445-12156-1-ND/3953822, LastUpdated="02.09.2020 1:02:21", Lifecycle Status=Active, Minimum Order=1, Mounting Type="Surface Mount, MLCC", Package / Case="0402 (1005 Metric)", Packaging=TapeAndReel, Part Number=CGA2B2X5R1A104K050BA, Part Status=Active, PartId=3289, Price=0.01, Series=CGA, Size / Dimension="0.039\" L x 0.020\" W (1.00mm x 0.50mm)", Supplier 1=DigiKey, Thickness (Max)="0.022\" (0.55mm)"
D1: library part Diode, "Rectifier Diode"
D2: library part "DIODE TVS UNI", "Rectifier Diode"
IC1: library part "REG3 1IN-2GND-3OUT", "3-Terminal Regulator 1=IN 2=GND 3=OUT"
J3: "WR-TBL Serie 1031 Horizontal Entry Modular, Pressure Clamp, THT, pitch 3.5mm, 2p", Manufacturer="Wurth Elektronik", Operating Temperature="-40 to +105degC", Rated Current [UL]=10A, Working Voltage [UL]=125VAC, Application="Pressure Clamp", ComponentLink1Description=Manufacturer, ComponentLink1URL=http://www.we-online.de, ComponentLink2Description=Datasheet, ComponentLink2URL=https://katalog.we-online.de/em/datasheet/691103110002.pdf, Manufacturer Part Number=691103110002, Modularity=Yes, Mounting Technology=THT, Packaging=Box, PCB/Cable/Panel=PCB, Pin Number=2, Pitch=3.5mm, Published Date="Feburary 2021", Type=Horizontal
LD1: library part LED_KINGBRIGHT_KPH-1608YC, "LED Yellow 1C 2A", Manufacturer=KINGBRIGHT, Manufacturer Part Number=KPH-1608YC, Author="CERN DEM JLC", Bonding=No, Color=Yellow, Component Type=Standard, ComponentHeight=0.65mm, CreateDate=03.07.2017, HelpURL=\\cern.ch\dfs\Applications\Altium\Datasheets\LED_KINGBRIGHT_KPH-1608YC.pdf, LatestRevisionDate=03.07.2017, Mounted=Yes, PackageDescription="SMT Yellow LED, Case 0603, Body L 1.6 x W 0.8mm H 0.65mm", Part Description="SMD Yellow LED, Case 1.6mmX0.8mm(0603), 0.65mm Thickness", Part Number=LED_KINGBRIGHT_KPH-1608YC, Pin Count=2, PressFit=No, Sense=No, SMD=Yes, Socket=No
OC1: library part Optoisolator
OC2 OC3 OC4 OC5: library part Optoisolator_1
P1: "WR-PHD Pin Header, THT, pitch 2mm, Single Row, Vertical, 4p", Contact Resistance=20mOhm, Manufacturer="Wurth Elektronik", Operating Temperature="-40 to +105degC", Rated Current=2A, Withstanding Voltage=500VAC, Working Voltage=200VAC, ComponentLink1Description=Manufacturer, ComponentLink1URL=http://www.we-online.de, ComponentLink2Description=Datasheet, ComponentLink2URL=https://www.we-online.com/catalog/datasheet/62000411121.pdf, Gender="Pin Header", Manufacturer Part Number=62000411121, Mounting Technology=THT, Orientation=Vertical, Packaging=Bag, Pin Number=4, Pitch=2mm, Row Number=Single
P2: "WR-PHD Pin Header, THT, pitch 2mm, Single Row, Vertical, 6p", Contact Resistance=20mOhm, Manufacturer="Wurth Elektronik", Operating Temperature="-40 to +105degC", Rated Current=2A, Withstanding Voltage=500VAC, Working Voltage=200VAC, ComponentLink1Description=Manufacturer, ComponentLink1URL=http://www.we-online.de, ComponentLink2Description=Datasheet, ComponentLink2URL=https://www.we-online.com/catalog/datasheet/62000611121.pdf, Gender="Pin Header", Manufacturer Part Number=62000611121, Mounting Technology=THT, Orientation=Vertical, Packaging=Bag, Pin Number=6, Pitch=2mm, Row Number=Single
P3: "WR-PHD Pin Header, THT, pitch 2.54mm, Single Row, Vertical, 3p", Contact Resistance=20mOhm, Manufacturer="Wurth Elektronik", Operating Temperature="-40 to +105degC", Rated Current=3A, Withstanding Voltage=500VAC, Working Voltage=250VAC, ComponentLink1Description=Manufacturer, ComponentLink1URL=http://www.we-online.de, ComponentLink2Description=Datasheet, ComponentLink2URL=https://www.we-online.com/catalog/datasheet/61300311121.pdf, Gender="Pin Header", Manufacturer Part Number=61300311121, Mounting Technology=THT, Orientation=Vertical, Packaging=Bag, Pin Number=3, Pitch=2.54mm, Row Number=Single
P4: "WR-PHD Pin Header, THT, pitch 2.54mm, Single Row, Vertical, 2p", Contact Resistance=20mOhm, Manufacturer="Wurth Elektronik", Operating Temperature="-40 to +105degC", Rated Current=3A, Withstanding Voltage=500VAC, Working Voltage=250VAC, ComponentLink1Description=Manufacturer, ComponentLink1URL=http://www.we-online.de, ComponentLink2Description=Datasheet, ComponentLink2URL=https://www.we-online.com/catalog/datasheet/61300211121.pdf, Gender="Pin Header", Manufacturer Part Number=61300211121, Mounting Technology=THT, Orientation=Vertical, Packaging=Bag, Pin Number=2, Pitch=2.54mm, Row Number=Single
P5: "WR-TBL Serie 2433 Horizontal Entry Modular, Rising Cage Clamp, THT, pitch 3.81mm, 7p", Manufacturer="Wurth Elektronik", Operating Temperature="-30 to +120degC", Rated Current [UL]=10A, Working Voltage [UL]=300VAC, Application="Rising Cage Clamp", ComponentLink1Description=Manufacturer, ComponentLink1URL=http://www.we-online.de, ComponentLink2Description=Datasheet, ComponentLink2URL=https://katalog.we-online.de/em/datasheet/691243310007.pdf, Manufacturer Part Number=691243310007, Modularity=No, Mounting Technology=THT, Packaging=Box, PCB/Cable/Panel=PCB, Pin Number=7, Pitch=3.81mm, Published Date="Feburary 2021", Type=Horizontal
R1 R2 R3 R8 R9 R10 R11 R12: library part RC0603JR-072K2L, "RES SMD 2.2K OHM 5% 1/10W 0603", Device Package="0603 (1608 Metric)", Manufacturer=Yageo, Operating Temperature="-55°C ~ 155°C", Power (Watts)="0.1W, 1/10W", Supplier Device Package=0603, Supplier Part Number 1=311-2.2KGRCT-ND, Temperature Coefficient=±100ppm/°C, Tolerance=±5%, ComponentLink1Description=Datasheet, ComponentLink1URL=https://www.yageo.com/upload/media/product/productsearch/datasheet/rchip/PYu-RC_Group_51_RoHS_L_10.pdf, ComponentLink2Description="DigiKey Link", ComponentLink2URL=http://digikey.com/product-detail/en/yageo/RC0603JR-072K2L/311-2.2KGRCT-ND/729676, Composition="Thick Film", Features="Moisture Resistant", Height - Seated (Max)="0.022\" (0.55mm)", LastUpdated="02.09.2020 1:09:59", Lifecycle Status=Active, Minimum Order=1, Number of Terminations=2, Package / Case="0603 (1608 Metric)", Packaging=CutTape, Part Number=RC0603JR-072K2L, Part Status=Active, PartId=17075, Price=0.10, Resistance="2.2 kOhms", Series=RC, Size / Dimension="0.063\" L x 0.031\" W (1.60mm x 0.80mm)", Supplier 1=DigiKey
R4 R5 R6 R7 R13: library part AC0603JR-07220RL, "RES SMD 220 OHM 5% 1/10W 0603", Device Package="0603 (1608 Metric)", Manufacturer=Yageo, Operating Temperature="-55°C ~ 155°C", Power (Watts)="0.1W, 1/10W", Ratings=AEC-Q200, Supplier Device Package=0603, Supplier Part Number 1=YAG3652CT-ND, Temperature Coefficient=±100ppm/°C, Tolerance=±5%, ComponentLink1Description=Datasheet, ComponentLink1URL=https://www.yageo.com/upload/media/product/productsearch/datasheet/rchip/PYu-AC_51_RoHS_L_7.pdf, ComponentLink2Description="DigiKey Link", ComponentLink2URL=http://digikey.com/product-detail/en/yageo/AC0603JR-07220RL/YAG3652CT-ND/6006501, Composition="Thick Film", Features="Automotive AEC-Q200, Moisture Resistant", Height - Seated (Max)="0.022\" (0.55mm)", LastUpdated="02.09.2020 1:10:02", Lifecycle Status=Active, Minimum Order=1, Number of Terminations=2, Package / Case="0603 (1608 Metric)", Packaging=CutTape, Part Number=AC0603JR-07220RL, Part Status=Active, PartId=15757, Price=0.10, Resistance="220 Ohms", Series=AC, Size / Dimension="0.063\" L x 0.031\" W (1.60mm x 0.80mm)", Supplier 1=DigiKey
R14 R15: library part RC0805JR-07270RL, "RES SMD 270 OHM 5% 1/8W 0805", Device Package="0805 (2012 Metric)", Manufacturer=Yageo, Operating Temperature="-55°C ~ 155°C", Power (Watts)="0.125W, 1/8W", Supplier Device Package=0805, Supplier Part Number 1=311-270ARCT-ND, Temperature Coefficient=±100ppm/°C, Tolerance=±5%, ComponentLink1Description=Datasheet, ComponentLink1URL=https://www.yageo.com/upload/media/product/productsearch/datasheet/rchip/PYu-RC_Group_51_RoHS_L_10.pdf, ComponentLink2Description="DigiKey Link", ComponentLink2URL=http://digikey.com/product-detail/en/yageo/RC0805JR-07270RL/311-270ARCT-ND/731238, Composition="Thick Film", Features="Moisture Resistant", Height - Seated (Max)="0.024\" (0.60mm)", LastUpdated="02.09.2020 1:14:53", Lifecycle Status=Active, Minimum Order=1, Number of Terminations=2, Package / Case="0805 (2012 Metric)", Packaging=CutTape, Part Number=RC0805JR-07270RL, Part Status=Active, PartId=41820, Price=0.10, Resistance="270 Ohms", Series=RC, Size / Dimension="0.079\" L x 0.049\" W (2.00mm x 1.25mm)", Supplier 1=DigiKey
U2: Package=None, Availability=Unavailable, MP=SN74ACT14DR, Price=None
U3: "Hex Schmitt-Triggered Inverters 14-SOIC -55 to 125", Package="SOIC-14 Texas Instruments", Availability="In Stock", Check_prices=https://www.snapeda.com/parts/CD74AC14M96/Texas+Instruments/view-part/?ref=eda, MF="Texas Instruments", MP=CD74AC14M96, Price=None, Purchase-URL=https://pricing.snapeda.com/search/part/CD74AC14M96/?ref=eda, SnapEDA_Link=https://www.snapeda.com/parts/CD74AC14M96/Texas+Instruments/view-part/?ref=snap
U4: "2/2 Transceiver Full RS232 16-SO", Package="SOIC-16 STMicroelectronics", Availability=Unavailable, MF=STMicroelectronics, MP=ST232BDR, Price=None, SnapEDA_Link=https://www.snapeda.com/parts/ST232BDR/STMicroelectronics/view-part/87836/?ref=snap
U5: library part MAX809TTRG, "Supervisor Push-Pull, Totem Pole 1 Channel SOT-23-3 (TO-236)", Package="SOT-23-3 ON Semiconductor", Availability=Unavailable, Check_prices=https://www.snapeda.com/parts/MAX809TTRG/ON%20Semiconductor/view-part/47418/?ref=eda, MF="ON Semiconductor", MP=MAX809TTRG, Price=None, SnapEDA_Link=https://www.snapeda.com/parts/MAX809TTRG/ON%20Semiconductor/view-part/47418/?ref=snap
Y1: "CRYS 16MHz ±20ppm Crystal 18pF 40 Ohm -20°C ~ 70°C Through Hole HC49/US", Digikey Part Number=535-9041-ND, Frequency=16MHz, Frequency Stability=±50ppm, Frequency Tolerance=±20ppm, Load Capacitance=18pF, Manufacturer=Abracon, Mouser Part Number=815-ABL-16-B2, Operating Mode=Fundamental, Package=HC/49US, Part Number=ABL-16.000MHZ-B2, Temperature="0ºC to +70ºC", Temperature Range High=+70ºC, Temperature Range Low=0ºC, ComponentLink1Description=Upverter, ComponentLink1URL=https://upverter.com/upn/revision/7ebf07e1da2eb130/, ComponentLink2Description=Datasheet, ComponentLink2URL=http://www.abracon.com/Resonators/ABL.pdf, Digikey Description="CRYS 16MHz ±20ppm Crystal 18pF 40 Ohm -20°C ~ 70°C Through Hole HC49/US", ESR="40 Ohm", HelpURL=https://upverter.com/upn/revision/7ebf07e1da2eb130/, Lead Free=yes, Price=0.175999999027, RoHS=TRUE, Supplier 1=Digi-Key, Supplier 2=Mouser, Supplier Part Number 1=535-9041-ND, Supplier Part Number 2=815-ABL-16-B2

## Free pads (board coordinates)
  round 1.65 hole 2.6 unplated: 2(5,2.5) 2(68.2,31.2)

## Via types
v1: diameter 0.6, hole 0.3, Top Layer to Bottom Layer, tented both sides, 46 vias
v2: diameter 1, hole 0.5, Top Layer to Bottom Layer, tented both sides, 16 vias

## Nets (pads, with @x,y where several pads share a name; then routed paths per layer and width w, separated by ;. In a path a pad name is that pad's centre, name@x,y a point inside that pad or via, vN(x,y) a via of type N, cw(c..) or ccw(c..) an arc to the next point about the centre after c; other vN are vias at no path point)
+5: C3.2 C7.2 C8.1 C9.1 C10.1 C11.1 C12.2 C22.1 IC1.3 LD1.2 P1.1 P2.1 P3.1 R2.2 R3.2 R8.2 R9.2 R10.2 R11.2 R12.2 U1.6 U1.7 U1.9 U2.14 U3.14 U4.16 U5.3 | length 166
  Top Layer w0.254: v2@42.712,31.688 42.712,31.651 46.923,27.44 46.923,26.577 47.25,26.25 ; U1.6 46.45,24.25 49.193,21.507 49.193,21.082 C8.1 ; U1.7 47.287,24.963 47.287,24.168 48.504,22.95 49.65,22.95 51.05,21.55 C7.2@51.05,20.625 ; C7.2@50.95,20.525 51.15,20.325
  Top Layer w0.3: C12.2 25.55,12.85 27.116,14.416 27.116,15.216 v2(27.25,15.35) 29.167,15.35 C11.1@29.267,15.25 ; U4.16 28.802,14.785 C11.1@29.267,15.25 ; C11.1 C11.1@29.267,15.25 ; 31.75,33.45 LD1.2 ; 32.825,33.45 C9.1 32.825,28.706 33.001,28.53 U2.14 ; C22.1@34.45,33.45 C22.1 ; v1(37.15,17.05) 37.15,17.131 37.45,17.431 37.45,18.321 37.405,18.365 U5.3 ; P1.1@40.35,41.95 40.35,40.45 41.325,39.475 C3.2 41.45,37.725 v2(41.45,36.05) ; P3.1 55.1,5.36 R12.2 R11.2 R10.2 R9.2 55.125,16.775 55.125,18.125 v1(55.15,18.15) ; P2.1 56.8,39.4 R8.2 ; R3.2 58.45,35.1 v1(58.45,34.05) 58.45,33.35 58.35,33.25 58.45,33.15 58.45,31.85 58.95,31.35 59.55,30.75 C10.1 60.2,30.575 U3.14
  Top Layer w0.6: C22.1 C22.1@35.05,33.45
  Top Layer w0.8: v2(28.301,31.655) 28.301,31.709 28.55,31.958 28.55,33.767 IC1.3 ; IC1.3@28.536,33.685 28.771,33.45 31.75,33.45 32.825,33.45 C22.1@34.45,33.45 ; C22.1@35.05,33.45 35.15,33.55 35.95,33.55 38.45,36.05 v2(41.45,36.05)
  Bottom Layer w0.3: 26.85,17.05 v1(37.15,17.05) ; 51.55,36.05 54.15,38.65 P2.1 ; 53.825,33.825 54.05,34.05 v1(58.45,34.05)
  Bottom Layer w0.8: v2(27.25,15.35) 27.25,15.404 26.85,15.804 26.85,17.05 26.85,30.204 v2(28.301,31.655) ; v2(42.604,31.796) 42.604,31.85 41.45,33.004 v2(41.45,36.05) 51.75,36.05 53.85,33.95 ; 53.95,33.95 53.95,19.35 v1(55.15,18.15)
+12: C1.2 C2.1 D1.2 D2.2 IC1.1 OC1.4 OC2.4 OC3.4 OC4.4 OC5.4 | length 53.6
  Top Layer w0.4: OC2.4 17.065,8.98 17.15,9.065 ; OC3.4 17.12,13.98 17.15,13.95 ; OC4.4 17.12,18.98 17.15,18.95 ; OC5.4 17.12,23.98 17.15,23.95
  Top Layer w0.8: OC1.4 15.95,2.98 17.15,4.18 17.15,9.065 17.15,13.95 17.15,18.95 17.15,23.95 v2(17.15,26.35) ; C2.1@19.575,31.35 19.975,31.75 v2(22.25,31.75) 22.288,31.788 22.352,31.788 23.964,33.4 IC1.1
  Bottom Layer w0.8: v2(17.15,26.35) 17.15,27.55 18.05,28.45 20.95,28.45 22.25,29.75 v2(22.25,31.75)
AIN12: P3.2 U1.8 | length 25.7
  Top Layer w0.3: U1.8 48.05,24.25 48.65,23.65 50.05,23.65 52.85,20.85 52.85,6.25 50.35,3.75 P3.2
But1: C15.2 P5.7 R9.1 U3.1 | length 29.2
  Top Layer w0.3: U3.1 55.27,28.68 56.463,28.68 v1(57.121,28.021) ; R9.1 C15.2 ; v1(58.964,19.964) 60.726,19.964 60.741,19.95 62.7,19.95 66.25,23.5 66.25,24.615 P5.7@67.45,25.815
  Bottom Layer w0.3: v1(57.121,28.021) 57.121,26.979 58.95,25.15 58.95,19.978 v1(58.964,19.964) 58.957,19.957 58.957,16.757 v1(58.95,16.75)
But1_: U1.15 U3.2 | length 8.8
  Top Layer w0.3: U1.15 52.15,31.25 53.35,30.05 53.35,27.606 53.526,27.43 U3.2
But2: C16.2 P5.6 R10.1 U3.3 | length 28.2
  Top Layer w0.3: U3.3 55.255,26.155 56.567,26.155 57.15,25.572 v1(57.15,25.25) ; R10.1 C16.2 ; v1(57.95,19.05) 63.45,19.05 66.426,22.026 67.106,22.026 P5.6@67.45,22.37
  Bottom Layer w0.3: v1(57.15,25.25) 57.15,24.65 57.95,23.85 57.95,14.662 58.093,14.52 58.093,14.307 v1(58.15,14.25)
But2_: U1.14 U3.4 | length 10.4
  Top Layer w0.3: U1.14 51.55,30.45 52.65,29.35 52.65,25.45 53.25,24.85 55.21,24.85 U3.4
But3: C17.2 P5.5 R11.1 U3.5 | length 28
  Top Layer w0.3: U3.5 56.636,23.62 v1(56.95,23.306) ; R11.1 v1(57.55,11.75) C17.2 ; v1(56.879,18.079) 67.126,18.079 67.45,18.402 P5.5@67.45,18.56
  Bottom Layer w0.3: v1(56.95,23.306) 56.95,18.979 56.879,18.907 56.879,12.421 v1(57.55,11.75)
But3_: U1.13 U3.6 | length 12.1
  Top Layer w0.3: U1.13 51.35,29.65 51.95,29.05 51.95,23.35 52.95,22.35 U3.6
But4: C18.2 P5.4 R12.1 U3.13 | length 32.2
  Top Layer w0.3: R12.1 58.55,9.25 ; C18.2 58.55,9.25 ; U3.13 61.889,27.43 62.069,27.25 v1(62.15,27.25) ; P5.4@67.45,14.75 63.062,10.362 59.062,10.362 58.55,9.85 58.55,9.25
  Bottom Layer w0.3: v1(62.15,27.25) 62.15,27.189 64.15,25.189 64.15,17.15 66.239,15.061 67.139,15.061 P5.4@67.45,14.75
But4_: U1.16 U3.12 | length 14.1
  Top Layer w0.3: U1.16 54.75,32.05 58.45,28.35 58.45,26.65 58.94,26.16 U3.12
Enter: R5.2 U2.8 | length 12
  Top Layer w0.3: R5.2@24.8,15.15 24.949,15.299 25.128,15.521 27.397,18.336 27.407,18.349 27.408,18.35 30.45,18.35 33.01,20.91 U2.8
Enter_: U1.32 U2.9 | length 9.7
  Top Layer w0.3: U2.9 35.48,22.18 v1(35.85,22.55) ; v1(38.75,22.95) 38.75,24.95 40.182,26.382 40.932,26.382 U1.32
  Bottom Layer w0.3: v1(35.85,22.55) 38.269,22.55 38.669,22.95 v1(38.75,22.95)
gerkon: C14.2 J3.2 R8.1 U2.13 | length 45.4
  Top Layer w0.3: U2.13 35.26,27.26 v1(36.95,28.95) ; v1(47.25,39.95) 53.05,39.95 54.9,38.1 R8.1 61.825,38.1 C14.2 61.925,38.15 63.45,38.15 65.8,40.5 J3.2
  Bottom Layer w0.3: v1(36.95,28.95) 36.95,29.031 37.353,29.434 37.353,29.453 38.55,30.65 38.55,38.95 39.55,39.95 v1(47.25,39.95)
gerkon_: U1.21 U2.12 | length 26.7
  Top Layer w0.3: U2.12 35.39,25.99 38.093,28.693 38.093,28.721 38.25,28.878 v1(38.25,28.919) ; U1.21 44.85,34.75 45.36,35.26 v1(45.36,37.54)
  Bottom Layer w0.3: v1(38.25,28.919) 38.3,28.919 39.55,30.169 39.55,38.65 39.95,39.05 44.35,39.05 45.36,38.04 v1(45.36,37.54)
GND: C1.1 C2.2 C3.1 C4.1 C5.1 C6.2 C7.1 C8.2 C9.2 C10.2 C11.2 C14.1 C15.1 C16.1 C17.1 C18.1 C20.1 C21.1 C22.2 D2.1 IC1.4 J1.6 J1.9 J2.6 J2.9 J3.1 OC1.2 OC2.2 OC3.2 OC4.2 OC5.2 P1.3 P2.2 P3.3 P5.1 R1.1 U1.4 U1.10 U2.7 U3.7 U4.15 U5.1 | length 57.7
  Top Layer w0.2: v2(21.1,39.9) 26.1,39.9 IC1.4 IC1.4@28.2,41.7
  Top Layer w0.254: U5.1@39.795,17.55 41.15,17.55 42.295,17.55 42.395,17.55 ; 42.25,9.95 42.295,9.95 C4.1 ; C5.1 50.75,9.95
  Top Layer w0.5: U1.4 v2(44.85,26.75) ; v2(47.75,27.25) U1.10
  Top Layer w0.66: C21.1@40.97,21.678 41.045,21.603 41.908,21.603 42.295,21.216 42.295,18.905 42.295,17.55 42.295,9.95 ; 42.25,9.95 42.25,8.437 42.637,8.05 50.363,8.05 50.75,8.437 50.75,9.95 50.75,14.45 49.25,15.95 46.45,15.95 45.75,16.65 45.75,19.151 46.168,19.569 46.168,20.72 46.065,20.823 46.065,22.235 v2(46,22.3)
  Bottom Layer w0.66: v2@47.685,27.185 v2(47.75,27.25)
  other v2: 19.2,10.2 37.3,14.2 55.8,19.7 30.9,22.8 24.1,27.7 50.8,34.8
I2C_scl: P4.2 R3.1 U1.12 | length 24.9
  Top Layer w0.3: U1.12 49.505,28.855 51.036,28.855 v1(51.09,28.91) ; v1(51.65,33.85) 51.65,34.318 52.394,35.063 v1(55.944,35.063) 57.012,35.063 R3.1
  Bottom Layer w0.3: v1(51.09,28.91) 51.09,28.966 51.65,29.525 v1(51.65,33.85) ; v1(55.944,35.063) 55.956,35.05 59.25,35.05 60.75,36.55 60.75,39.78 P4.2
I2C_sda: P4.1 R2.1 U1.11 | length 26.3
  Top Layer w0.3: U1.11 v1(51.15,28.05) ; v1(52.675,32.875) 52.712,32.912 55.881,32.912 55.919,32.95 R2.1
  Bottom Layer w0.3: v1(51.15,28.05) 51.207,28.107 51.507,28.107 52.65,29.25 52.65,32.85 v1(52.675,32.875) ; v1@55.968,32.95 59.15,32.95 62.85,36.65 62.85,40.22 P4.1
  other v1: 56,32.95
Led1: R14.1 U3.10 | length 26.5
  Top Layer w0.3: R14.1 58.875,3.775 v1(59.25,4.15) ; U3.10 60.235,23.585 62.215,23.585 v1(62.25,23.55)
  Bottom Layer w0.3: v1(59.25,4.15) 61.55,4.15 63.25,5.85 63.25,22.55 v1(62.25,23.55)
Led1_: U1.18 U3.11 | length 32.5
  Top Layer w0.3: U1.18 47.25,36.95 48.45,38.15 51.95,38.15 53.85,36.25 59.25,36.25 64.025,31.475 64.025,27.225 61.69,24.89 U3.11
Led2: R15.1 U3.8 | length 20
  Top Layer w0.3: R15.1 58.775,7.036 59.05,7.311 v1(59.05,7.35) ; U3.8 60.21,21.07 62.23,21.07 v1(62.24,21.06)
  Bottom Layer w0.3: v1(59.05,7.35) 61.45,7.35 62.25,8.15 62.25,13.661 62.24,13.671 v1(62.24,21.06)
Led2_: U1.19 U3.9 | length 38.9
  Top Layer w0.3: U1.19 46.45,37.55 47.95,39.05 52.25,39.05 54.3,37 59.8,37 64.85,31.95 64.85,24.65 62.55,22.35 U3.9
Minus: R4.2 U2.10 | length 11.7
  Top Layer w0.3: R4.2@24.8,17.95 26.3,19.45 29.45,19.45 33.393,23.393 34.193,23.393 U2.10
Minus_: U1.29 U2.11 | length 8.5
  Top Layer w0.3: U2.11 35.22,24.72 39.35,28.85 U1.29
NetC12_1: C12.1 U4.2 | length 7.2
  Top Layer w0.3: C12.1 25.55,9.085 26.015,9.55 27.85,9.55 30.072,7.328 U4.2
NetC13_1: C13.1 U4.1 | length 3.9
  Top Layer w0.3: C13.1 27.94,3.44 28.802,4.302 U4.1
NetC13_2: C13.2 U4.3 | length 3.9
  Top Layer w0.3: C13.2 30.56,3.56 31.342,4.342 U4.3
NetC19_1: C19.1 U4.4 | length 4.4
  Top Layer w0.3: U4.4 32.612,4.588 33.85,3.35 33.85,2.715 34.315,2.25 C19.1
NetC19_2: C19.2 U4.5 | length 5.6
  Top Layer w0.3: U4.5 33.939,5.768 33.939,4.761 34.85,3.85 35.95,3.85 36.45,3.35 36.45,2.715 36.915,2.25 C19.2
NetC20_2: C20.2 U4.6 | length 9
  Top Layer w0.3: U4.6 35.152,7.052 35.75,7.65 40.02,7.65 40.709,6.961 40.709,5.351 C20.2@40.75,5.31
NetLD1_1: LD1.1 R1.2 | length 2.1
  Top Layer w0.3: LD1.1 R1.2
NetOC1_1: OC1.1 R5.1 | length 15
  Top Layer w0.3: OC1.1 22.83,2.95 24.45,2.95 25.35,3.85 25.35,5.75 23.5,7.6 R5.1@23.5,15.15
NetOC2_1: OC2.1 R4.1 | length 10.6
  Top Layer w0.3: OC2.1 20.549,9.029 21.153,9.029 22.45,10.325 22.45,16.05 23.5,17.1 R4.1@23.5,17.95
NetOC3_1: OC3.1 R7.1 | length 8.1
  Top Layer w0.3: OC3.1 20.6,13.98 21.75,15.13 21.75,18.25 23.425,19.925 23.425,20.675 R7.1@23.5,20.75
NetOC4_1: OC4.1 R6.1 | length 5.8
  Top Layer w0.3: OC4.1 20.6,18.98 22.05,20.43 22.05,22.25 22.807,23.007 23.257,23.007 R6.1@23.5,23.25
NetOC5_1: OC5.1 R13.1 | length 3.7
  Top Layer w0.3: OC5.1 20.596,24.076 21.176,24.076 22.75,25.65 23.4,25.65 R13.1@23.5,25.75
NetP5_2: P5.2 R14.2 | length 8.8
  Top Layer w0.4: R14.2 62.15,2.75 66.22,6.82 P5.2
NetP5_3: P5.3 R15.2 | length 9.2
  Top Layer w0.4: R15.2 61.65,5.95 66.325,10.625 67.745,10.625 P5.3
not_use: R6.2 U2.4 | length 4.1
  Top Layer w0.3: R6.2 24.949,23.299 25.599,23.299 27.02,24.72 U2.4
not_use_: U1.27 U2.3 | length 16.9
  Top Layer w0.3: U2.3 29.49,25.99 30.15,26.65 v1(30.15,29.85) ; v1(34.65,31.05) 36.55,31.05 37.15,30.45 U1.27
  Bottom Layer w0.3: v1(30.15,29.85) 31.35,31.05 v1(34.65,31.05)
OC1: J1.2 J2.2 OC1.3 | length 36.9
  Top Layer w0.4: J1.2@3.98,9.17 3.805,8.995 3.805,8.245 4.8,7.25 8.75,7.25 ; J2.2@3.98,30.17 3.98,28.52 5.05,27.45 5.05,23.55 8.75,19.85 8.75,7.25 ; OC1.3 11.97,7.25 8.75,7.25
OC2: J1.1 J2.1 OC2.3 | length 29.8
  Top Layer w0.4: J2.1@6.52,30.17 6.52,23.88 10.15,20.25 10.15,15.75 12.58,13.32 v1(12.58,11.52) OC2.3
  Bottom Layer w0.4: J1.1 6.3,9.45 10.509,9.45 v1(12.58,11.52)
OC3: J1.3 J2.3 OC3.3 | length 29.9
  Top Layer w0.4: J2.3 6.622,33.46 7.012,33.07 7.13,33.07 8.75,31.45 8.75,23.55 11.15,21.15 11.15,17.85 12.55,16.45 ; v1(12.55,15.85) 12.55,16.45 ; OC3.3 12.62,16.52 12.55,16.45
  Bottom Layer w0.4: J1.3 6.28,11.95 8.65,11.95 v1(12.55,15.85)
OC4: J1.4 J2.4 OC4.3 | length 36.3
  Top Layer w0.4: J2.4 5.02,34.75 8.275,34.75 10.075,32.95 10.075,24.355 v1(12.95,21.48) 12.97,21.5 13.98,21.5 OC4.3
  Bottom Layer w0.4: J1.4 4.06,11.96 5.35,13.25 7.775,13.25 12.95,18.425 v1(12.95,21.48)
OC5: J1.5 J2.5 OC5.3 | length 29.7
  Top Layer w0.4: J2.5 9.3,36 11.45,33.85 11.45,27.076 11.98,26.546 v1(11.98,26.533) 11.993,26.52 OC5.3@13.5,26.52
  Bottom Layer w0.4: J1.5@6.52,14.25 11.98,19.71 v1(11.98,26.533)
OSCin: C4.2 U1.2 Y1.1 | length 15.7
  Top Layer w0.254: U1.2 43.25,21.75 43.81,21.19 43.81,20.99 43.81,12.874 44.925,11.759 C4.2
OSCout: C5.2 U1.3 Y1.2 | length 19
  Top Layer w0.254: U1.3 44.05,22.45 44.75,21.75 44.75,15.45 46.45,13.75 ; C5.2 47.946,10.079 47.946,12.254 47.6,12.6 46.45,13.75 ; Y1.2 46.45,13.75
Plus: R7.2 U2.6 | length 4
  Top Layer w0.3: R7.2 24.949,20.799 25.599,20.799 26.98,22.18 U2.6
Plus_: U1.28 U2.5 | length 17.2
  Top Layer w0.3: U2.5 29.6,23.45 31.65,25.5 v1(31.65,28.85) ; v1(34.05,29.65) U1.28
  Bottom Layer w0.3: v1(31.65,28.85) 32.45,29.65 v1(34.05,29.65)
Power: D1.1 J1.10 J2.10 | length 35.6
  Top Layer w1: J2.10 3.864,41.214 3.864,42.414 4.45,43 10.8,43 11.55,42.25 D1.1
  Bottom Layer w1: J2.10 3.643,40.993 2.493,40.993 1.65,40.15 1.65,20.55 2.513,19.687 3.623,19.687 J1.10@3.846,19.464
Reset: C21.2 P1.4 U1.1 U5.2 | length 29
  Top Layer w0.254: U5.2@39.495,19.39 39.575,19.47 C21.2 39.582,21.657 39.582,22.382 39.85,22.65 39.85,23.005 40.092,23.247 v1(40.092,23.327) ; v1@40.092,23.35 42.15,23.35 42.45,23.65 U1.1
  Bottom Layer w0.3: P1.4@34.35,41.95 34.35,40.15 35.65,38.85 35.65,28.55 39.947,24.253 39.947,23.553 40.092,23.408 v1(40.092,23.327)
RX1in: J1.8 J2.8 U4.13 | length 76
  Top Layer w0.4: v1(32.55,9.25) 32.55,9.304 32.612,9.366 U4.13
  Bottom Layer w0.4: J1.8 3.704,17.014 2.514,17.014 1.375,15.875 1.375,6.65 3.05,4.975 25.675,4.975 28.25,7.55 30.95,7.55 32.45,9.05 32.45,9.096 32.55,9.196 v1(32.55,9.25) ; J2.8 5.02,37.25 7.45,37.25 8.175,36.525 8.175,19.2 7.275,18.3 5.5,18.3 4.61,17.41 4.452,17.41 J1.8@3.889,16.847
RX_: U1.31 U4.12 | length 19.1
  Top Layer w0.3: U4.12 33.882,13.201 34.25,13.569 v1(34.25,13.65) ; v1(35.95,15.35) 35.95,19.15 37.65,20.85 37.65,24.85 40.05,27.25 U1.31
  Bottom Layer w0.3: v1(34.25,13.65) v1(35.95,15.35)
SPI_miso: P2.6 U1.24 | length 9.3
  Top Layer w0.3: U1.24 42.45,34.95 42.9,35.4 42.9,40.8 P2.6
SPI_mosi: P2.5 U1.23 | length 9.8
  Top Layer w0.3: U1.23 43.25,34.95 43.6,35.3 43.6,39.5 P2.5
SPI_nss: P2.3 U1.17 | length 9.9
  Top Layer w0.3: U1.17 48.05,36.55 48.95,37.45 v1(49.75,37.45)
  Bottom Layer w0.3: v1(49.75,37.45) 49.75,37.531 50.15,37.931 P2.3
SPI_sck: P2.4 U1.22 | length 10.2
  Top Layer w0.3: U1.22 44.068,33.518 44.068,34.868 44.4,35.2 44.4,38.3 45.35,39.25 P2.4
Start: R13.2 U2.2 | length 4.1
  Top Layer w0.3: R13.2 25.049,25.899 25.599,25.899 26.96,27.26 U2.2
Start_: U1.25 U2.1 | length 14.8